# EAGLE board AZR3350 (EAGLE 9.2.2)
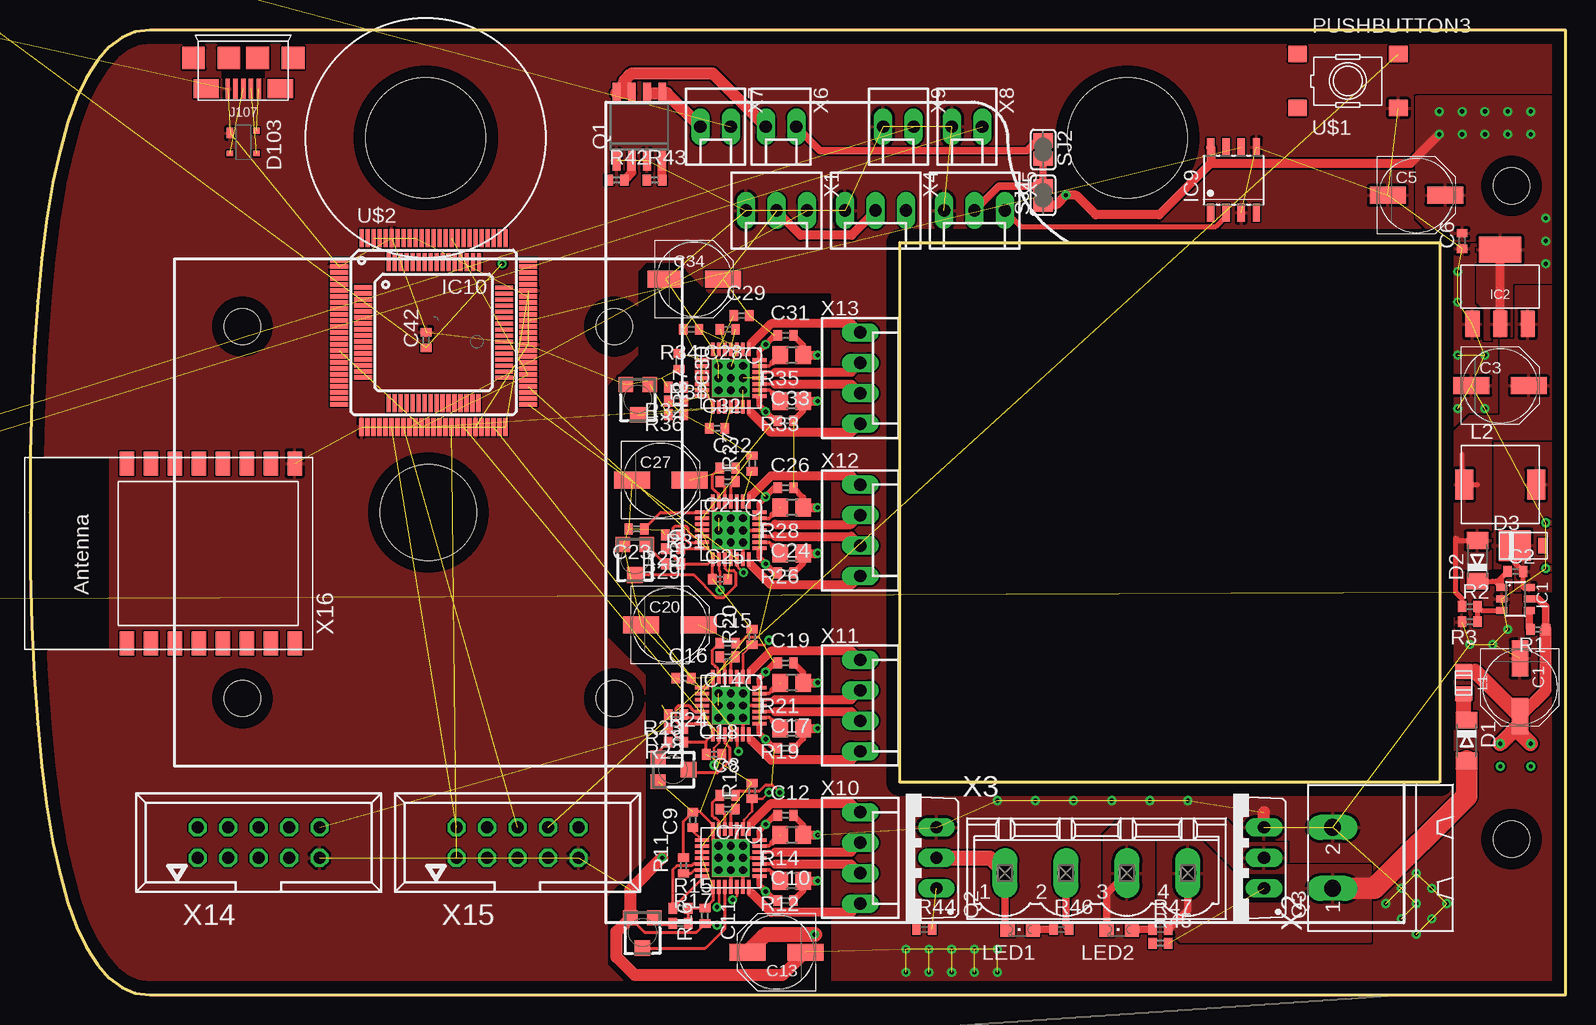
[diagram p0: board, top side]
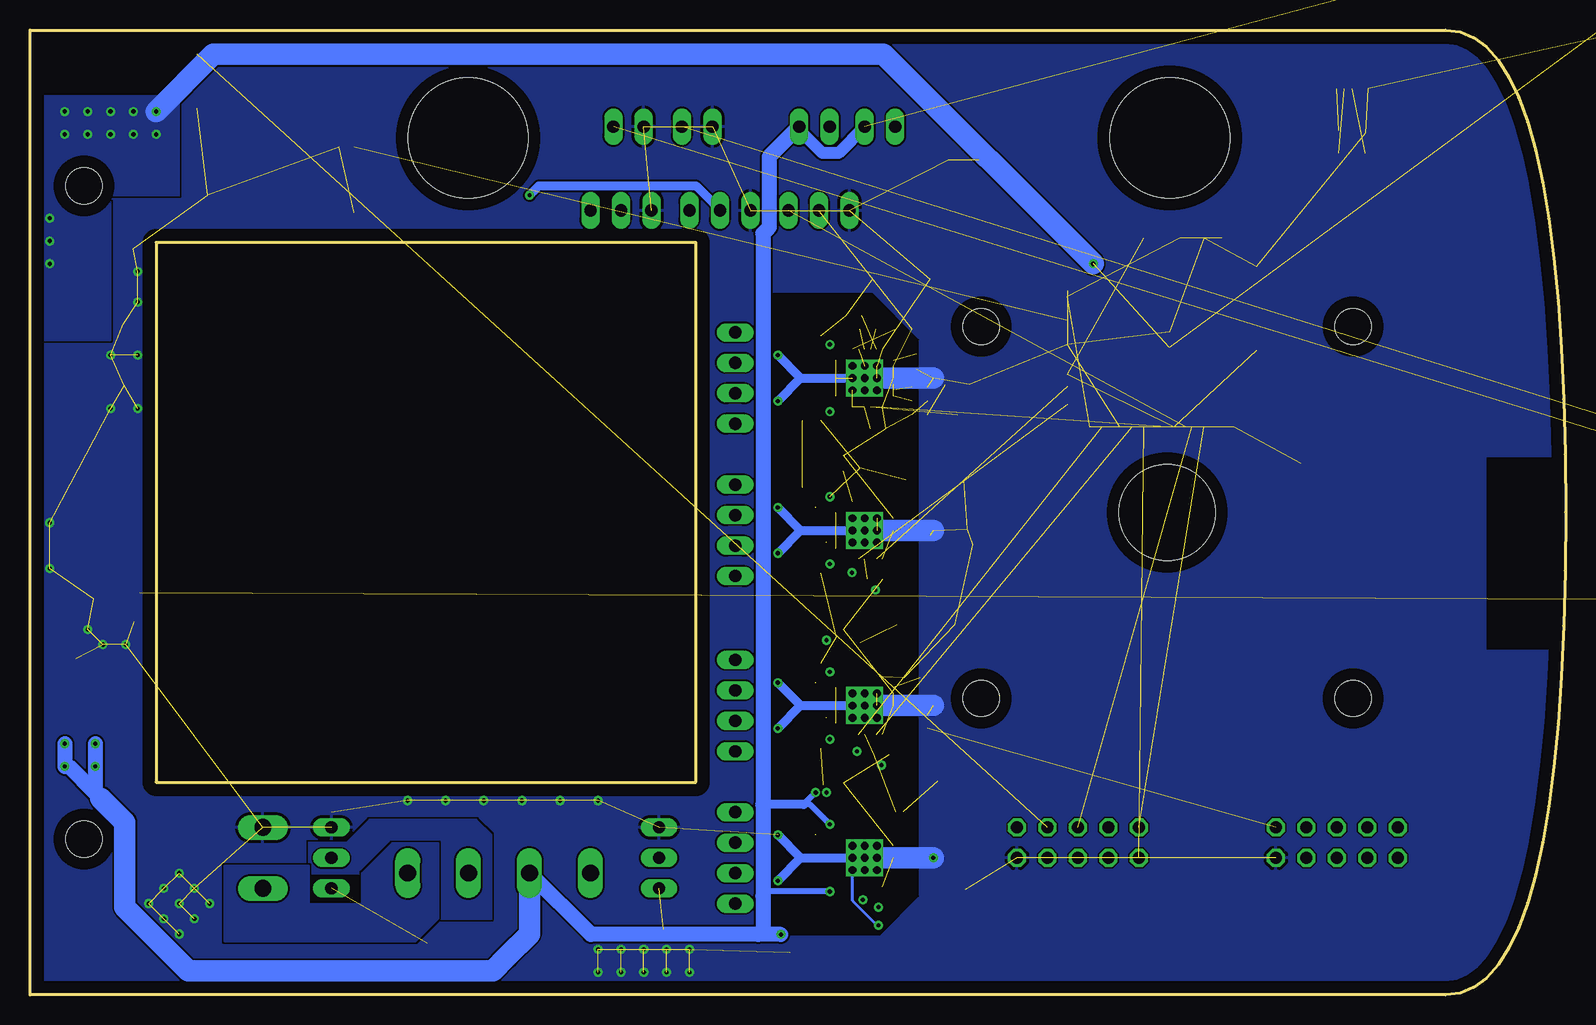
[diagram p1: board, bottom side, seen from below]

Size 128 x 80.46 mm. Coordinates in mm from the lower left corner, seen from the top.
Outline: 0,40.23 0.04,35.36 0.16,30.8 0.35,26.56 0.62,22.63 0.98,19.01 1.41,15.71 1.91,12.73 2.5,10.06 3.16,7.7 3.91,5.66 4.73,3.93 5.62,2.51 6.6,1.41 7.66,0.63 8.79,0.16 10,0 128,0 128,80.46 10,80.46 8.79,80.3 7.66,79.83 6.6,79.04 5.62,77.94 4.73,76.53 3.91,74.8 3.16,72.76 2.5,70.4 1.91,67.73 1.41,64.74 0.98,61.44 0.62,57.83 0.35,53.9 0.16,49.66 0.04,45.1 0,40.23
Outline: 117.5,62.73 117.5,17.73 72.5,17.73 72.5,62.73 117.5,62.73
Copper layers (1*16): Top 0.035mm / dielectric 1.5mm / Bottom 0.035mm
Design rules "default *": minimum track width 6mil, minimum drill 0.35mm, track to track 6mil, track to pad 6mil, pad to pad 6mil, via to via 6mil, smd to smd 6mil, copper to edge 40mil, drill to drill 6mil, minimum pad ring 10mil, minimum via ring 8mil, stop-mask expansion 4mil, vias tented up to drill 0mil, thermal gap 10mil
Net classes: 1 USB: width 0.102 mm, drill 0.1 mm; 2 gnd: width 0.102 mm, drill 0.1 mm; 3 usbvcc: width 0.102 mm, drill 0.1 mm, clearance 0.15 mm; 4 diff: width 0.152 mm
Holes 10 mm at 32.98,71.46 91.48,71.46
Holes 3 mm at 123.5,13 123.5,67.46 17.71,24.73 48.71,55.73 17.71,55.73 48.71,24.73
Holes 8 mm at 33.21,40.23
tKeepout: area 45.7,52.7 to 51.7,58.7; area 45.7,21.7 to 51.7,27.7; area 120.5,10 to 126.5,16; area 120.5,64.5 to 126.5,70.5; area 14.7,52.7 to 20.7,58.7; area 14.7,21.7 to 20.7,27.7

## Footprints (pad centres in the part's own frame; a part is rotated, then mirrored left to right if it is on the bottom)
R0402 = smd 0.7 x 0.9: 1 -0.65,0; 2 0.65,0
PANASONIC_D = smd 3 x 1.4: + 2.4,0; - -2.4,0
C0402 = smd 0.7 x 0.9: 1 -0.65,0; 2 0.65,0
C0603 = smd 1.1 x 1: 1 -0.85,0; 2 0.85,0
MINIMELF = smd 1.4 x 1.8: A 1.7,0; C -1.7,0
DO220AAL = smd 2.667 x 2.54: P$1 -0.7,0 | smd 0.762 x 1.27: P$2 1.65,0
SOT143B = smd 0.88 x 0.55: 1 -0.75,-1.1 | smd 0.48 x 0.55: 2 0.95,-1.1; 3 0.95,1.1; 4 -0.95,1.1
SOT23-6 = smd 0.6 x 0.9: 1 -0.95,-1.15; 2 0,-1.15; 3 0.95,-1.15; 4 0.95,1.15; 5 0,1.15; 6 -0.95,1.15
SOT223 = smd 2.235 x 1.219: 1 -3.099,2.311; 2 -3.099,0; 3 -3.099,-2.311 | smd 2.2 x 3.6: 4 3.099,0
QFN28-TP = smd 1.15 x 0.3: 1 -2.4,1.5; 2 -2.4,1; 3 -2.4,0.5; 4 -2.4,0; 5 -2.4,-0.5; 6 -2.4,-1; 7 -2.4,-1.5; 15 2.4,-1.5; 16 2.4,-1; 17 2.4,-0.5; 18 2.4,0; 19 2.4,0.5; 20 2.4,1; 21 2.4,1.5 | smd 0.3 x 1.15: 8 -1.5,-2.4; 9 -1,-2.4; 10 -0.5,-2.4; 11 0,-2.4; 12 0.5,-2.4; 13 1,-2.4; 14 1.5,-2.4; 22 1.5,2.4; 23 1,2.4; 24 0.5,2.4; 25 0,2.4; 26 -0.5,2.4; 27 -1,2.4; 28 -1.5,2.4 | smd 3.15 x 3.15: PAD 0,0
SOIC08-FAIRCHILD = smd 0.61 x 1.52: 1 -1.905,-2.723; 2 -0.635,-2.723; 3 0.635,-2.723; 4 1.905,-2.723; 5 1.905,2.723; 6 0.635,2.723; 7 -0.635,2.723; 8 -1.905,2.723
LQFP64 = smd 1.5 x 0.35: 1 -5.875,3.75; 2 -5.875,3.25; 3 -5.875,2.75; 4 -5.875,2.25; 5 -5.875,1.75; 6 -5.875,1.25; 7 -5.875,0.75; 8 -5.875,0.25; 9 -5.875,-0.25; 10 -5.875,-0.75; 11 -5.875,-1.25; 12 -5.875,-1.75; 13 -5.875,-2.25; 14 -5.875,-2.75; 15 -5.875,-3.25; 16 -5.875,-3.75; 33 5.875,-3.775; 34 5.875,-3.275; 35 5.875,-2.775; 36 5.875,-2.275; 37 5.875,-1.775; 38 5.875,-1.275; 39 5.875,-0.775; 40 5.875,-0.275; 41 5.875,0.225; 42 5.875,0.725; 43 5.875,1.225; 44 5.875,1.725; 45 5.875,2.225; 46 5.875,2.725; 47 5.875,3.225; 48 5.875,3.725 | smd 0.35 x 1.5: 17 -3.75,-5.875; 18 -3.25,-5.875; 19 -2.75,-5.875; 20 -2.25,-5.875; 21 -1.75,-5.875; 22 -1.25,-5.875; 23 -0.75,-5.875; 24 -0.25,-5.875; 25 0.25,-5.875; 26 0.725,-5.875; 27 1.225,-5.875; 28 1.725,-5.875; 29 2.225,-5.875; 30 2.725,-5.875; 31 3.225,-5.875; 32 3.725,-5.875; 49 3.775,5.875; 50 3.275,5.875; 51 2.75,5.875; 52 2.25,5.875; 53 1.75,5.875; 54 1.25,5.875; 55 0.75,5.875; 56 0.25,5.875; 57 -0.25,5.875; 58 -0.75,5.875; 59 -1.25,5.875; 60 -1.75,5.875; 61 -2.25,5.875; 62 -2.75,5.875; 63 -3.25,5.875; 64 -3.75,5.875
USB-MICRO-10103594 = smd 0.4 x 1.6: D+ 0,0; D- -0.65,0; GND 1.3,0; ID 0.65,0; VBUS -1.3,0 | smd 1.9 x 1.9: SHLD1 -1.2,-2.55; SHLD2 1.2,-2.55; SHLD3 -4.15,-2.55; SHLD4 4.15,-2.55 | smd 2.1 x 1.6: SHLD5 3.1,0; SHLD6 -3.1,0
C0805 = smd 1.5 x 1.25: 1 0,0.95; 2 0,-0.95
SRR0604 = smd 1.5 x 2.5: P$1 3,0; P$2 -3,0
C0603' = smd 1 x 0.95: 1 0,0.8; 2 0,-0.8
CHIPLED_0805 = smd 1.2 x 1.2: A 0,-1.05; C 0,1.05
M08A = smd 0.65 x 1.75: 1 -1.905,-2.8; 2 -0.635,-2.8; 3 0.635,-2.8; 4 1.905,-2.8; 5 1.905,2.8; 6 0.635,2.8; 7 -0.635,2.8; 8 -1.905,2.8
TO220BV = drill 1.016 long: D 0,-2.54; G -2.54,-2.54; S 2.54,-2.54
R0805 = smd 1.3 x 1.5: 1 -0.95,0; 2 0.95,0
RTRIM3103 = smd 1.2 x 1.25: 1 -1,-1.225; 3 1,-1.225 | smd 1.3 x 1.3: 2 0,1.3
SJ = smd 1.168 x 1.6: 1 -0.762,0; 2 0.762,0
TS42_4PINS = smd 1.6 x 1.4: 1 -4.2,2.25; 2 4.2,2.25; 3 -4.2,-2.25; 4 4.2,-2.25
LQFP100 = smd 1.5 x 0.35: 1 -7.875,6; 2 -7.875,5.5; 3 -7.875,5; 4 -7.875,4.5; 5 -7.875,4; 6 -7.875,3.5; 7 -7.875,3; 8 -7.875,2.5; 9 -7.875,2; 10 -7.875,1.5; 11 -7.875,1; 12 -7.875,0.5; 13 -7.875,0; 14 -7.875,-0.5; 15 -7.875,-1; 16 -7.875,-1.5; 17 -7.875,-2; 18 -7.875,-2.5; 19 -7.875,-3; 20 -7.875,-3.5; 21 -7.875,-4; 22 -7.875,-4.5; 23 -7.875,-5; 24 -7.875,-5.5; 25 -7.875,-6; 51 7.875,-6; 52 7.875,-5.5; 53 7.875,-5; 54 7.875,-4.5; 55 7.875,-4; 56 7.875,-3.5; 57 7.875,-3; 58 7.875,-2.5; 59 7.875,-2; 60 7.875,-1.5; 61 7.875,-1; 62 7.875,-0.5; 63 7.875,0; 64 7.875,0.5; 65 7.875,1; 66 7.875,1.5; 67 7.875,2; 68 7.875,2.5; 69 7.875,3; 70 7.875,3.5; 71 7.875,4; 72 7.875,4.5; 73 7.875,5; 74 7.875,5.5; 75 7.875,6 | smd 0.35 x 1.5: 26 -6.025,-7.875; 27 -5.525,-7.875; 28 -5.025,-7.875; 29 -4.525,-7.875; 30 -4.025,-7.875; 31 -3.525,-7.875; 32 -3.025,-7.875; 33 -2.525,-7.875; 34 -2.025,-7.875; 35 -1.525,-7.875; 36 -1.025,-7.875; 37 -0.525,-7.875; 38 -0.025,-7.875; 39 0.475,-7.875; 40 0.975,-7.875; 41 1.475,-7.875; 42 1.975,-7.875; 43 2.475,-7.875; 44 2.975,-7.875; 45 3.475,-7.875; 46 3.975,-7.875; 47 4.475,-7.875; 48 4.975,-7.875; 49 5.475,-7.875; 50 5.975,-7.875; 76 6,7.875; 77 5.5,7.875; 78 5,7.875; 79 4.5,7.875; 80 4,7.875; 81 3.5,7.875; 82 3,7.875; 83 2.5,7.875; 84 2,7.875; 85 1.5,7.875; 86 1,7.875; 87 0.5,7.875; 88 0,7.875; 89 -0.5,7.875; 90 -1,7.875; 91 -1.5,7.875; 92 -2,7.875; 93 -2.5,7.875; 94 -3,7.875; 95 -3.5,7.875; 96 -4,7.875; 97 -4.5,7.875; 98 -5,7.875; 99 -5.5,7.875; 100 -6,7.875
MOLEX-KK-254-3 = drill 1.02 long: 1 -2.54,0; 2 0,0; 3 2.54,0
MSTBA2 = drill 1.397 long: 1 -2.54,5.08; 2 2.54,5.08
MSTBV4 = drill 1.397 long: 1 -7.62,0; 2 -2.54,0; 3 2.54,0; 4 7.62,0
MOLEX-KK-254-2 = drill 1.02 long: 1 -1.27,0; 2 1.27,0
MOLEX-KK-254-4 = drill 1.02 long: 1 -3.81,0; 2 -1.27,0; 3 1.27,0; 4 3.81,0
057-010-1 = drill 1 octagon: 1 -5.08,-1.27; 2 -5.08,1.27; 3 -2.54,-1.27; 4 -2.54,1.27; 5 0,-1.27; 6 0,1.27; 7 2.54,-1.27; 8 2.54,1.27; 9 5.08,-1.27; 10 5.08,1.27
ESP-12 = smd 2 x 1.2: 1 -7.5,4.5; 2 -7.5,2.5; 3 -7.5,0.5; 4 -7.5,-1.5; 5 -7.5,-3.5; 6 -7.5,-5.5; 7 -7.5,-7.5; 8 -7.5,-9.5; 9 7.5,-9.5; 10 7.5,-7.5; 11 7.5,-5.5; 12 7.5,-3.5; 13 7.5,-1.5; 14 7.5,0.5; 15 7.5,2.5; 16 7.5,4.5
CRYSTAL_TC26SMD = smd 1.27 x 0.635: 1 0,1.27; 2 0,-1.27 | smd 1.905 x 2.032: P$1 5.715,0

## Placement (x,y rotation side)
4K7  [R0402]  -18.41,87 0 top  (outside the outline)
180R  [R0402]  -18.41,83.19 0 top  (outside the outline)
C1  10uF  [PANASONIC_D]  124.21,25.65 270 top
C2  10n  [C0402]  123.83,35.31 0 top
C3  47u  [PANASONIC_D]  122.56,50.8 0 top
C4  4.7uF  [C0402]  -58.42,32.77 0 top  (outside the outline)
C5  10uF  [PANASONIC_D]  115.57,66.67 0 top
C6  4.7uF  [C0402]  119.38,62.87 90 top
C7  100n  [C0402]  58.17,15.49 180 top
C8  100n  [C0402]  58.17,16.64 0 top
C9  220n  [C0402]  55.24,14.61 90 top
C10  100n  [C0402]  62.99,7.87 0 top
C11  220n  [C0402]  56.26,6.6 270 top
C12  100n  [C0402]  62.99,14.99 0 top
C13  100u  [PANASONIC_D]  62.23,3.56 180 top
C14  100n  [C0402]  58.17,28.19 180 top
C15  100n  [C0402]  58.17,29.34 0 top
C16  220n  [C0402]  54.48,26.42 0 top
C17  100n  [C0402]  62.99,20.57 0 top
C18  220n  [C0402]  57.02,20.07 0 top
C19  100n  [C0402]  62.99,27.69 0 top
C20  100u  [PANASONIC_D]  53.34,30.86 0 top
C21  100n  [C0402]  58.17,42.8 180 top
C22  100n  [C0402]  58.17,43.94 0 top
C23  220n  [C0402]  50.55,38.86 180 top
C24  100n  [C0402]  62.99,35.18 0 top
C25  220n  [C0402]  57.53,34.67 0 top
C26  100n  [C0402]  62.99,42.29 0 top
C27  100u  [PANASONIC_D]  52.58,42.93 0 top
C28  100n  [C0402]  58.17,55.5 180 top
C29  100n  [C0402]  59.31,56.64 0 top
C30  220n  [C0402]  54.1,52.83 270 top
C31  100n  [C0402]  62.99,54.99 0 top
C32  220n  [C0402]  57.28,47.24 0 top
C33  100n  [C0402]  62.99,47.88 0 top
C34  100u  [PANASONIC_D]  55.37,59.69 0 top
C35  100n  [C0402]  -78.74,27.3 270 top  (outside the outline)
C36  100n  [C0402]  -75.56,24.89 270 top  (outside the outline)
C37  100n  [C0402]  -74.42,24.89 270 top  (outside the outline)
C38  6.8p  [C0402]  -67.31,27.94 0 top  (outside the outline)
C39  6.8p  [C0402]  -67.31,26.67 0 top  (outside the outline)
C40  10u  [C0603]  -66.17,31.75 90 top  (outside the outline)
C41  100n  [C0402]  -64.64,31.75 90 top  (outside the outline)
C42  100n  [C0402]  33.02,54.61 90 top
C43  2.2u  [C0402]  -65.02,25.4 90 top  (outside the outline)
C44  2.2u  [C0402]  -63.88,26.04 270 top  (outside the outline)
D1  BYS10-45-E3  [MINIMELF]  119.76,21.21 270 top
D2  CD1206-S01575  [MINIMELF]  120.65,36.2 90 top
D3  SS1P3L  [DO220AAL]  124.46,37.47 0 top
D103  PRTR5V0U2XB  [SOT143B]  17.78,71.12 270 top
IC1  LM2734Y  [SOT23-6]  123.83,33.02 270 top
IC2  LDO-TS1117CW-3V3  [SOT223]  122.56,59.05 90 top
IC5  A4988  [QFN28-TP]  58.42,11.43 270 top
IC6  A4988  [QFN28-TP]  58.42,24.13 270 top
IC7  A4988  [QFN28-TP]  58.42,38.73 270 top
IC8  A4988  [QFN28-TP]  58.42,51.44 270 top
IC9  SI87XXIS  [SOIC08-FAIRCHILD]  100.33,67.94 0 top
IC10  ATSAM4S8B  [LQFP64]  33.66,55.24 0 top
J107  ZX62-AB-5PA  [USB-MICRO-10103594]  17.78,75.56 180 top
L1  MH2029-300Y  [C0805]  119.51,26.04 180 top
L2  10uH-SRR0604-100ML  [SRR0604]  122.56,42.55 0 top
L3  BLM18PG471SN1  [C0603']  -63.5,31.75 180 top  (outside the outline)
LED1  [CHIPLED_0805]  82.55,5.46 90 top
LED2  [CHIPLED_0805]  90.81,5.46 90 top
LED3  [CHIPLED_0805]  -10.79,92.08 0 top  (outside the outline)
LED4  [CHIPLED_0805]  -17.14,92.08 0 top  (outside the outline)
Q1  FDS6890A  [M08A]  50.8,72.39 0 top
Q2  IRF520  [TO220BV]  73.03,11.43 90 top
Q3  IRF520  [TO220BV]  100.33,11.43 90 top
R1  10k  [R0402]  125.73,30.48 180 top
R2  52.3k  [R0402]  120.02,32.38 0 top
R3  10k  [R0402]  120.02,31.11 180 top
R4  10K  [R0402]  -62.74,26.04 90 top  (outside the outline)
R5  10K  [R0402]  -61.59,25.4 270 top  (outside the outline)
R6  4K7 0.1%  [R0402]  -62.87,28.57 180 top  (outside the outline)
R11  10K  [R0402]  54.48,10.79 90 top
R12  0R2  [R0805]  63.5,9.53 180 top
R13  10K  [R0402]  60.2,17.02 90 top
R14  0R2  [R0805]  63.5,13.34 180 top
R15  100K  [R0402]  54.23,7.24 0 top
R16  10K  [RTRIM3103]  51.05,5.21 180 top
R17  20K  [R0402]  54.23,5.97 0 top
R18  10K  [R0402]  53.85,23.37 180 top
R19  0R2  [R0805]  63.5,22.23 180 top
R20  10K  [R0402]  60.2,29.84 90 top
R21  0R2  [R0805]  63.5,26.04 180 top
R22  100K  [R0402]  53.85,22.23 180 top
R23  10K  [RTRIM3103]  53.59,18.8 270 top
R24  20K  [R0402]  53.85,21.08 0 top
R25  10K  [R0402]  53.59,38.35 180 top
R26  0R2  [R0805]  63.5,36.83 180 top
R27  10K  [R0402]  60.2,44.32 90 top
R28  0R2  [R0805]  63.5,40.64 180 top
R29  100K  [R0402]  53.59,37.21 180 top
R30  10K  [RTRIM3103]  50.42,36.32 180 top
R31  20K  [R0402]  53.59,35.94 0 top
R32  10K  [R0402]  53.85,50.67 180 top
R33  0R2  [R0805]  63.5,49.53 180 top
R34  10K  [R0402]  55.12,55.5 180 top
R35  0R2  [R0805]  63.5,53.34 180 top
R36  100K  [R0402]  53.85,49.53 180 top
R37  10K  [RTRIM3103]  50.67,49.66 180 top
R38  20K  [R0402]  53.85,48.39 0 top
R39  4K7 0.1%  [R0402]  -62.87,29.72 180 top  (outside the outline)
R42  1K  [R0402]  48.9,67.94 0 top
R43  1K  [R0402]  52.07,67.94 0 top
R44  180R  [R0402]  74.55,5.46 0 top
R45  180R  [R0402]  94.23,4.32 0 top
R46  4K7  [R0402]  85.98,5.46 0 top
R47  4K7  [R0402]  94.23,5.46 0 top
SJ1  [SJ]  84.45,66.67 90 top
SJ2  [SJ]  84.45,70.48 270 top
U$1  PUSHBUTTON3  [TS42_4PINS]  109.86,76.2 0 top
U$2  ATSAM4S8C  [LQFP100]  33.66,55.24 0 top
X1  KK-254-3  [MOLEX-KK-254-3]  62.23,65.41 180 top
X2  MSTBA2  [MSTBA2]  113.67,11.43 90 top
X3  MSTBV4  [MSTBV4]  88.9,10.16 0 top
X4  KK-254-3  [MOLEX-KK-254-3]  70.48,65.41 180 top
X5  KK-254-3  [MOLEX-KK-254-3]  78.74,65.41 180 top
X6  KK-254-2  [MOLEX-KK-254-2]  62.61,72.39 180 top
X7  KK-254-2  [MOLEX-KK-254-2]  57.15,72.39 180 top
X8  KK-254-2  [MOLEX-KK-254-2]  78.11,72.39 180 top
X9  KK-254-2  [MOLEX-KK-254-2]  72.39,72.39 180 top
X10  KK-254-4  [MOLEX-KK-254-4]  69.22,11.43 270 top
X11  KK-254-4  [MOLEX-KK-254-4]  69.22,24.13 270 top
X12  KK-254-4  [MOLEX-KK-254-4]  69.22,38.73 270 top
X13  KK-254-4  [MOLEX-KK-254-4]  69.22,51.44 270 top
X14  057-010-1  [057-010-1]  19.05,12.7 0 top
X15  057-010-1  [057-010-1]  40.64,12.7 0 top
X16  [ESP-12]  12.57,36.83 90 top
XC1  32.768kHz  [CRYSTAL_TC26SMD]  -66.67,24.13 180 top  (outside the outline)

## Library data of the parts
4K7 180R C1-C44 R1-R6 R11-R39 R42-R47 = resistor
D1 D2 = Diodi; CASE: 1206; MONTHLY_USAGE: _____; PART_NUMBER: CD1206-S01575; PRICE: _____; SUPPLIER: _____; TYPE: Diodi
D3 = Diodi; CASE: SMP; MONTHLY_USAGE: _____; PART_NUMBER: SS1P3L-M3/84A; PRICE: _____; SUPPLIER: _____; TYPE: Diodi
D103 J107 L1 L3 XC1 = Arduino
IC1 = Circuito Integrato; CASE: SOT23-5; MONTHLY_USAGE: _____; PART_NUMBER: LM2734YMK; PRICE: _____; SUPPLIER: _____; TYPE: Circuito_Integrato
IC2 = we-power
IC5-IC8 = RepRapjr
IC9 IC10 U$2 = misc
L2 = Induttanze; CASE: SMD_6,5x6,5; MONTHLY_USAGE: _____; PART_NUMBER: SRR0604-100ML; PRICE: _____; SUPPLIER: _____; TYPE: Induttanze
LED1-LED4 = led
Q1-Q3 = transistor-power
SJ1 SJ2 = jumper
U$1 = Zero_V1.0
X1 X4-X13 = con-other
X2 = con-phoenix-508; MF: FARNELL; MPN: 1757242; OC_FARNELL: 3705171; OC_NEWARK: 71C4161
X3 = con-phoenix-508; MPN: MSTBV 2,5/4-GF-5.08; OC_FARNELL: 1792794; OC_NEWARK: 69R9847
X14 X15 = con-panduit; OC_FARNELL: unknown; OC_NEWARK: unknown
X16 = adafruit

## Nets
+3V3: C5.+ C6.2 C11.1 C18.1 C25.1 C32.1 C35.1 C37.1 C42.1 IC2.2 IC2.4 IC5.9 IC5.10 IC5.11 IC5.15 IC6.9 IC6.10 IC6.11 IC6.15 IC7.9 IC7.10 IC7.11 IC7.15 IC8.9 IC8.10 IC8.11 IC8.15 IC9.8 L3.2 LED4.A R13.2 R15.2 R17.2 R20.2 R22.2 R24.2 R27.2 R29.2 R31.2 R34.2 R36.2 R38.2 SJ1.1 X1.2 X4.2 X14.10
+5V [usbvcc]: C3.+ C4.1 D2.A IC2.3 L2.P$2 R2.1
+24V: C1.+ C8.2 C10.1 C12.1 C13.+ C15.2 C17.1 C19.1 C20.+ C22.2 C24.1 C26.1 C27.+ C29.2 C31.1 C33.1 C34.+ IC1.5 IC5.22 IC5.28 IC6.22 IC6.28 IC7.22 IC7.28 IC8.22 IC8.28 L1.2 LED3.A R1.1 R46.2 SJ2.1 X3.2 X6.1 X7.1
ADVREF: C40.1 C41.1 L3.1 R6.2 R39.2
BED: R45.1
BEEP: U$2.30
BEEPER: X14.1
BOOST: C2.1 D2.C IC1.1
BTN_EN1: X15.5
BTN_EN2: X15.3
BTN_ENC: X14.2
CARDDETECT: X15.7
CP1E: C28.1 IC8.4
CP1X: C7.1 IC5.4
CP1Y: C14.1 IC6.4
CP1Z: C21.1 IC7.4
CP2E: C28.2 IC8.5
CP2X: C7.2 IC5.5
CP2Y: C14.2 IC6.5
CP2Z: C21.2 IC7.5
E_DIR: IC8.19
E_EN: IC8.2 R34.1
E_STEP: IC8.16 U$2.37
EMOT1A: IC8.24 X13.3
EMOT1B: IC8.21 X13.4
EMOT2A: IC8.26 X13.2
EMOT2B: IC8.1 X13.1
EN: IC1.4 R1.2
ENC_B: U$2.40
ENC_SW: U$2.49
FAN1: R42.1
FAN2: R43.1
FB: IC1.3 R2.2 R3.1
GND: 4K7.2 180R.2 C1.- C3.- C4.2 C5.- C6.1 C9.2 C10.2 C11.2 C12.2 C13.- C16.2 C17.2 C18.2 C19.2 C20.- C23.2 C24.2 C25.2 C26.2 C27.- C30.2 C31.2 C32.2 C33.2 C34.- C35.2 C36.2 C37.2 C38.1 C39.1 C40.2 C41.2 C42.2 C43.2 C44.2 D3.P$2 D103.1 IC1.2 IC2.1 IC5.3 IC5.7 IC5.18 IC5.20 IC5.25 IC5.PAD IC6.3 IC6.7 IC6.18 IC6.20 IC6.25 IC6.PAD IC7.3 IC7.7 IC7.18 IC7.20 IC7.25 IC7.PAD IC8.3 IC8.7 IC8.18 IC8.20 IC8.25 IC8.PAD IC9.3 IC9.5 J107.GND Q1.1 Q1.3 Q2.S Q3.S R3.2 R11.2 R12.1 R14.1 R16.3 R18.2 R19.1 R21.1 R23.3 R25.2 R26.1 R28.1 R30.3 R32.2 R33.1 R35.1 R37.3 U$1.4 U$2.2 U$2.26 U$2.45 U$2.61 U$2.70 U$2.95 X1.3 X2.2 X4.3 X5.3 X8.2 X9.2 X14.9 X15.9 X16.9 XC1.P$1
HEATER0: U$2.25
HEATER1: U$2.47
HOTEND: R44.1
KILL: X15.10
LCD_CS: U$2.62
LCD_D4: X14.5
LCD_D5: X14.6
LCD_D6: X14.7
LCD_D7: X14.8
LCD_E: X14.3
LCD_RS: X14.4
MISO: U$2.41 X15.1
MOSI: U$2.33 X15.6
N$1: D1.C L1.1
N$2: R4.2 R6.1 X8.1
N$3: R5.2 R39.1 X9.1
N$5: U$2.27 U$2.50 U$2.69 U$2.91 U$2.98
N$6: U$2.16 U$2.36 U$2.56 U$2.85
N$11: D103.4 J107.VBUS
N$12: SJ1.2 SJ2.2 X5.2
N$13: Q1.2 R42.2
N$18: Q1.4 R43.2
N$19: R23.1 R24.1
N$20: Q2.G R44.2
N$21: Q1.5 Q1.6 X7.2
N$22: Q1.7 Q1.8 X6.2
N$23: LED1.C Q2.D X3.1
N$24: LED2.C Q3.D X3.3
N$25: Q3.G R45.2
N$26: LED1.A R46.1
N$27: LED2.A R47.1
N$33: 4K7.1 LED3.C
N$34: 180R.1 LED4.C
N$51: R30.1 R31.1
NPCS0: U$2.42
NRST: U$2.60
REFE: IC8.17 R37.2
REFE-IN: R37.1 R38.1
REFX: IC5.17 R16.2
REFX-IN: R16.1 R17.1
REFY: IC6.17 R23.2
REFZ: IC7.17 R30.2
RESET: U$1.2 X15.8
ROSCE: IC8.13 R32.1
ROSCX: IC5.13 R11.1
ROSCY: IC6.13 R18.1
ROSCZ: IC7.13 R25.1
RSTE: IC8.12 IC8.14 R36.1
RSTX: IC5.12 IC5.14 R15.1
RSTY: IC6.12 IC6.14 R22.1
RSTZ: IC7.12 IC7.14 R29.1
SCK: U$2.31 X15.2
SD_CD: U$2.58
SNS1E: IC8.23 R33.2
SNS1X: IC5.23 R12.2
SNS1Y: IC6.23 R19.2
SNS1Z: IC7.23 R26.2
SNS2E: IC8.27 R35.2
SNS2X: IC5.27 R14.2
SNS2Y: IC6.27 R21.2
SNS2Z: IC7.27 R28.2
SS: X15.4
SW [USB]: C2.2 D3.P$1 IC1.6 L2.P$1
T_BED: C43.1 R4.1
T_EXT: C44.1 R5.1
THERMISTOR0: U$2.24
THERMISTOR1: U$2.3
TWCK0: U$2.55
URXD1: U$2.7
USB_N [diff]: D103.3 J107.D-
USB_P [diff]: D103.2 J107.D+
UTXD1: U$2.9
VCC: X16.8
VCPE: C29.1 IC8.6
VCPX: C8.1 IC5.6
VCPY: C15.1 IC6.6
VCPZ: C22.1 IC7.6
VDDCORE: C36.1
VIN: D1.A R47.2 X2.1 X3.4
VREGE: C30.1 IC8.8
VREGX: C9.1 IC5.8
VREGY: C16.1 IC6.8
VREGZ: C23.1 IC7.8
X_DIR: IC5.19
X_EN: IC5.2 R13.1
X_STEP: IC5.16
X_STOP: U$2.34 X1.1
XIN32: C39.2 XC1.2
XMOT1A: IC5.24 X10.3
XMOT1B: IC5.21 X10.4
XMOT2A: IC5.26 X10.2
XMOT2B: IC5.1 X10.1
XOUT32: C38.2 XC1.1
Y_DIR: IC6.19 U$2.48
Y_EN: IC6.2 R20.1
Y_STEP: IC6.16 U$2.43
Y_STOP: X4.1
YMOT1A: IC6.24 X11.3
YMOT1B: IC6.21 X11.4
YMOT2A: IC6.26 X11.2
YMOT2B: IC6.1 X11.1
Z_DIR: IC7.19 U$2.51
Z_EN: IC7.2 R27.1
Z_STEP: IC7.16 U$2.54
Z_STOP: IC9.6 U$2.65
Z_STOP_IN: IC9.2 X5.1
ZMOT1A: IC7.24 X12.3
ZMOT1B: IC7.21 X12.4
ZMOT2A: IC7.26 X12.2
ZMOT2B: IC7.1 X12.1

## Tracks (layer width: path | path; a pad name or v marks a point on that pad's centre or on a via)
+3V3  (via drill 0.35)  (25 unrouted)
  Top 0.254: IC5.15 56.92,7.91 C11.1 54.89,7.25 R15.2 R17.2 | IC5.11 IC5.10 IC5.9 | R22.2 53.61,21.81 53.66,21.81 53.83,21.65 53.83,21.6 54.34,21.08 R24.2 56.27,21.08 56.37,21.18 | C18.1 56.37,21.18 | 56.37,21.18 IC6.15 | R29.2 54.21,35.94 R31.2 56.53,35.94 IC7.15 56.88,36.3 C25.1 | IC7.11 IC7.10 IC7.9
  Top 0.762: IC2.2 IC2.4 | 98.42,69.35 94.13,65.06 88.83,65.06 87.22,66.67 v86.36,66.67 85.6,65.91 SJ1.1 | X4.2 70.48,65.34 68.48,63.34 64.23,63.34 62.23,65.34 X1.2 | 98.42,69.35 115.07,69.35 v117.47,71.75 | IC9.8 98.42,69.35
  Bottom 0.762: v86.36,66.67 85.57,67.47 72.49,67.47 70.48,65.47 X4.2
  Bottom 1.778: v117.47,73.66 112.71,78.42 56.83,78.42 v39.37,60.96
  other vias: 119.38,73.66 121.28,73.66 123.19,73.66 125.09,73.66 125.09,71.75 123.19,71.75 121.28,71.75 119.38,71.75 126.36,64.77 126.36,62.87 126.36,60.96
  pour Top (rank 3): 123.83,54.61 121.28,54.61 121.28,57.15 120.65,57.78 120.65,62.87 117.47,62.87 115.57,64.77 115.57,74.93 127.64,74.93 127.64,58.42
  pour Bottom (rank 3): 121.28,54.61 121.28,66.67 115.57,66.67 115.57,74.93 127.64,74.93 127.64,54.61
+5V  (1 unrouted)
  Top 0.406: 120.65,42.55 L2.P$2 119.38,42.72 119.38,45.09 | R2.1 119.38,32.4 119.38,33.02 118.85,33.55 118.85,38.1 119.05,37.9 D2.A
  pour Top: 121.79,35.56 121.79,46.35 127.64,46.35 127.64,59.05 123.83,59.05 123.83,54.61 122.56,54.61 122.56,48.26 120.02,48.26 116.84,45.09 116.84,35.56
+24V  (via drill 0.35)  (13 unrouted)
  Top 0.254: 126.35,30.48 R1.1 | C8.2 59.22,17.04 60.82,17.04 61.32,17.54 61.87,17.54 62.25,17.15 62.25,17.13 v62.5,16.88 | 60.76,29.87 59.67,29.87 59.15,29.34 C15.2
  Top 0.305: 60.82,9.53 IC5.22 | 60.82,13.34 IC5.28 | 60.82,36.83 IC7.22 | 60.82,40.64 IC7.28 | 60.82,49.53 IC8.22 | 60.82,53.34 IC8.28 | 60.82,22.23 IC6.22 | 60.82,26.04 IC6.28
  Top 0.508: 60.82,9.74 60.82,9.53 60.82,9.13 v61.33,8.62 62.08,7.87 C10.1 | 60.82,13.12 60.82,13.34 60.82,13.73 v61.33,14.24 62.08,14.99 C12.1 | 60.82,37.05 60.82,36.83 60.82,36.44 v61.33,35.93 62.08,35.18 C24.1 | 60.82,40.42 60.82,40.64 60.82,41.03 v61.33,41.54 62.08,42.29 C26.1 | 60.82,49.75 60.82,49.53 60.82,49.14 v61.33,48.63 62.08,47.88 C33.1 | 60.82,53.12 60.82,53.34 60.82,53.73 v61.33,54.24 62.08,54.99 C31.1 | 60.82,22.44 60.82,22.23 60.82,21.83 v61.33,21.32 62.08,20.57 C17.1 | 60.82,25.82 60.82,26.04 60.82,26.43 v61.33,26.94 62.08,27.69 C19.1
  Top 0.61: IC1.5 125.73,33.02 126.36,32.38 126.35,32.37 126.35,30.48 | X6.1 65.87,70.4 83.1,70.4 83.95,71.25 SJ2.1 | X3.2 86.36,5.73 R46.2
  Top 1.016: C1.+ 126.35,25.4 126.35,30.48
  Top 1.27: L1.2 120.47,26.98 C1.+ | C1.+ 124.21,22.61 v122.56,20.95 | C1.+ 124.21,21.84 v125.09,20.95 | C13.+ 61.32,5.04 v65.41,5.04
  Bottom 0.508: v61.33,14.24 62.97,15.88 63.51,15.88 v62.5,16.88 | 66.9,8.26 66.53,8.62 v61.33,8.62
  Bottom 0.762: 63.51,15.88 66.9,15.88
  Bottom 1.016: X7.1 60.61,70.2 61.93,70.2 63.88,72.15 X6.1
  Bottom 1.27: v122.56,20.95 v122.56,19.05 122.56,16.87 | v125.09,20.95 v125.09,19.05 124.73,19.05 122.56,16.87 | 89.66,1.78 88.27,3.17 | 122.56,16.87 122.09,16.41 | 67.31,5.04 81.24,5.04 X3.2 | v65.41,5.04 67.31,5.04 | 67.31,5.04 66.9,5.46 66.9,8.26 66.9,15.88 66.9,63.49 66.39,64 66.39,69.88 X6.1
  Bottom 1.778: 122.09,16.41 120.09,14.41 120.09,7.32 114.81,2.03 89.41,2.03 88.27,3.17 86.36,5.08 X3.2
ADVREF  (4 unrouted)
BOOST
  Top 0.406: D2.C 121.92,34.49 122.15,34.49 | 122.15,34.49 IC1.1 122.67,34.81 | 122.67,34.81 C2.1 | 122.15,34.49 122.36,34.49 122.67,34.81
CP1E  (1 unrouted)
CP1X
  Top 0.254: IC5.4 58.42,15.1 C7.1
CP1Y
  Top 0.254: IC6.4 58.42,27.8 C14.1
CP1Z
  Top 0.254: IC7.4 58.42,42.4 C21.1
CP2E  (1 unrouted)
CP2X
  Top 0.254: IC5.5 57.92,15.09 C7.2
CP2Y
  Top 0.254: IC6.5 57.92,27.79 C14.2
CP2Z
  Top 0.254: IC7.5 57.92,42.4 C21.2
E_EN  (1 unrouted)
E_STEP  (1 unrouted)
EMOT1A
  Top 0.305: IC8.24 62.12,50.94
  Top 0.762: X13.3 68.44,50.94 62.12,50.94
EMOT1B
  Top 0.305: 60.14,48.52 59.92,48.75 IC8.21
  Top 0.762: X13.4 68.49,46.9 61.77,46.9 60.14,48.52
EMOT2A
  Top 0.305: IC8.26 62.12,51.94
  Top 0.762: X13.2 68.44,51.94 62.12,51.94
EMOT2B
  Top 0.305: IC8.1 59.92,54.12 60.14,54.35
  Top 0.762: X13.1 68.49,55.97 61.77,55.97 60.14,54.35
EN
  Top 0.61: R1.2 124.97,30.59 IC1.4
FB
  Top 0.406: R3.1 R2.2 120.98,32.07 IC1.3
GND  (via drill 0.35, 0.65)  (108 unrouted)
  Top 0.152: D3.P$2 126.36,37.47
  Top 0.254: R11.2 54.48,14.49 C9.2 55.87,15.26 56.92,14.2 IC5.7 | R16.3 51.25,5.24 55.55,5.24 C11.2 57.11,5.95 v57.26,5.8
  Top 0.305: IC5.18 v58.42,10.41 | IC5.20 59.42,10.4 v59.44,10.41 | IC5.25 v59.44,11.43 | IC5.3 58.92,12.95 v58.42,12.45 | IC5.7 56.92,12.93 v57.4,12.45 | IC6.18 v58.42,23.11 | IC6.20 59.42,23.1 v59.44,23.11 | IC6.25 v59.44,24.13 | IC6.3 58.92,25.66 v59.44,25.15 | IC6.7 56.92,25.63 v57.4,25.15 | IC7.18 v58.42,37.72 | IC7.20 59.42,37.7 v59.44,37.72 | IC7.25 v59.44,38.73 | IC7.7 56.92,40.48 57.4,39.99 v57.4,39.75 | IC7.3 58.92,40.25 v58.42,39.75
  Top 0.508: C12.2 64.45,14.18 R14.1 | C10.2 64.45,8.68 R12.1 | C19.2 64.45,26.88 R21.1 | C17.2 64.45,21.38 R19.1 | C26.2 64.45,41.48 R28.1 | C24.2 64.45,35.99 R26.1 | C31.2 64.45,54.18 R35.1 | C33.2 64.45,48.69 R33.1
  Top 0.762: R14.1 v65.66,13.34 | R12.1 v65.66,9.53 | R21.1 v65.66,26.04 | R19.1 v65.66,22.23 | R28.1 v65.66,40.64 | R26.1 v65.66,36.83 | R35.1 v65.66,53.34 | R33.1 v65.66,49.53
  Top 1.016: C13.- 62.73,1.65 50.42,1.65 48.9,3.17 48.9,5.27 R16.3 50.05,8.78 v52.7,11.43 | Q3.S 102.87,15.24
  Bottom 0.254: v57.26,5.8 57.38,5.8 59.44,7.85 v59.44,10.41
  Bottom 0.762: v59.44,12.45 v59.44,11.43 v59.44,10.41 | v59.44,12.45 v58.42,12.45 v57.4,12.45 | v57.4,12.45 v57.4,11.43 v57.4,10.41 | v57.4,10.41 v58.42,10.41 v59.44,10.41 | IC5.PAD v57.4,12.45 | IC5.PAD v59.44,10.41 | v57.4,10.41 IC5.PAD | IC5.PAD v59.44,12.45 | v65.66,9.53 63.75,11.43 | 63.75,11.43 IC5.PAD | v65.66,13.34 63.75,11.43 | v59.44,25.15 v59.44,24.13 v59.44,23.11 | v59.44,25.15 v58.42,25.15 v57.4,25.15 IC6.PAD | v59.44,23.11 v58.42,23.11 v57.4,23.11 IC6.PAD | IC6.PAD v59.44,23.11 | IC6.PAD v59.44,25.15 | v65.66,22.23 63.75,24.13 | 63.75,24.13 IC6.PAD | v65.66,26.04 63.75,24.13 | v59.44,39.75 v59.44,38.73 v59.44,37.72 | v59.44,39.75 v58.42,39.75 v57.4,39.75 IC7.PAD | v59.44,37.72 v58.42,37.72 v57.4,37.72 IC7.PAD | IC7.PAD v59.44,37.72 | IC7.PAD v59.44,39.75 | v65.66,36.83 63.75,38.73 | 63.75,38.73 IC7.PAD | v65.66,40.64 63.75,38.73 | v59.44,52.45 v59.44,51.44 v59.44,50.42 | v59.44,52.45 v58.42,52.45 v57.4,52.45 IC8.PAD | v59.44,50.42 v58.42,50.42 v57.4,50.42 IC8.PAD | IC8.PAD v59.44,50.42 | IC8.PAD v59.44,52.45 | v65.66,49.53 63.75,51.44 | 63.75,51.44 IC8.PAD | v65.66,53.34 63.75,51.44
  Bottom 1.778: v57.4,11.43 v52.7,11.43 | v57.4,24.13 52.7,24.13 | v57.4,38.73 52.7,38.73 | v57.4,51.44 52.7,51.44
  other vias: 119.02,48.9 121.28,48.9 119.02,53.34 121.28,53.34 119.02,57.78 119.02,60.33 121.92,29.21 120.02,29.21 123.19,30.48 126.36,35.56 126.36,39.37 58.42,11.43 58.42,24.13 58.42,38.73 58.42,51.44 96.52,16.21 93.34,16.21 90.17,16.21 87,16.21 83.82,16.21 80.64,16.21 73.03,3.81 74.93,3.81 76.83,3.81 76.83,1.91 74.93,1.91 73.03,1.91 113.03,7.62 114.3,8.89 115.57,10.16 116.84,8.89 115.57,7.62 114.3,6.35 115.57,5.08 116.84,6.35 118.11,7.62 78.74,3.81 80.64,3.81 80.64,1.91 78.74,1.91
  pour Bottom (rank 4): -2.54,-2.54 129.54,-2.54 129.54,82.55 -2.54,82.55
  pour Top (rank 4): -1.27,-1.27 128.27,-1.27 128.27,81.28 -1.27,81.28
  cutout Bottom: 53.98,8.26 53.98,54.61 57.78,58.42 66.67,58.42 66.67,5.08 57.15,5.08
  cutout Top: 48.26,50.8 50.8,53.34 50.8,60.33 51.44,60.96 53.98,60.96 56.52,58.42 66.67,58.42 66.67,0 50.8,0 48.26,2.54 48.26,8.26 51.44,11.43 51.44,26.67 48.26,29.84
MISO  (1 unrouted)
MOSI  (1 unrouted)
N$1
  Top 1.27: D1.C 119.51,23.16 L1.1
N$2  (2 unrouted)
N$3  (2 unrouted)
N$4
  pour Bottom (rank 2): 93.98,6.35 89.53,6.35 89.53,13.34 90.81,14.61 99.69,14.61 101.6,12.7 104.78,12.7 104.78,10.16 100.33,10.16 97.79,12.7 93.98,12.7
N$5  (4 unrouted)
N$6  (3 unrouted)
N$11  (1 unrouted)
N$12
  Top 0.61: SJ2.2 SJ1.2 80.77,67.44 X5.2
N$13
  Top 0.762: R42.2 50.16,68.56 Q1.2
N$18
  Top 0.762: R43.2 52.7,67.96 Q1.4
N$19
  Top 0.254: R23.1 52.37,20.25 R24.1
N$20  (1 unrouted)
N$21
  Top 0.305: Q1.6 51.61,75.19
  Top 1.016: 51.61,75.19 Q1.5 53.08,75.19 X7.2
N$22
  Top 0.305: Q1.7 49.99,75.19
  Top 1.016: 49.99,75.19 49.53,75.19 | 49.53,75.19 Q1.8 | 49.53,75.19 49.53,76.2 50.16,76.83 56.9,76.83 X6.2
N$23
  Top 0.61: LED1.C 81.28,5.68 X3.1
  Top 1.27: Q2.D 80.01,11.43 X3.1
N$24
  Top 0.61: LED2.C 89.75,8.47 X3.3
  pour Top (rank 2): 93.98,6.35 89.53,6.35 89.53,13.34 90.81,14.61 99.69,14.61 101.6,12.7 104.78,12.7 104.78,10.16 100.33,10.16 97.79,12.7 93.98,12.7
N$25  (1 unrouted)
N$26
  Top 0.61: R46.1 LED1.A
N$27
  Top 0.61: R47.1 LED2.A
N$33  (1 unrouted)
N$34  (1 unrouted)
N$51
  Top 0.254: R31.1 51.42,37.47 R30.1
REFE  (1 unrouted)
REFE-IN  (1 unrouted)
REFX
  Top 0.254: R16.2 56.3,3.91 57.92,5.53 IC5.17
REFX-IN
  Top 0.406: R16.1 52.52,5.97 R17.1
REFY
  Top 0.254: IC6.17 57.92,21.01 58.3,20.63 58.3,19.5 57.31,18.51 55.18,18.51 R23.2
REFZ
  Top 0.254: R30.2 55.34,35.02 57.24,33.11 57.82,33.11 58.81,34.1 58.81,35.24 58.65,35.4 58.09,35.4 57.92,35.57 IC7.17
RESET  (1 unrouted)
ROSCE  (1 unrouted)
ROSCX
  Top 0.254: IC5.13 55.4,10.43 55.12,10.14 R11.1
ROSCY
  Top 0.254: R18.1 54.74,23.13 IC6.13
ROSCZ
  Top 0.254: R25.1 54.3,38.35 54.91,37.73 IC7.13
RSTE  (2 unrouted)
RSTX
  Top 0.254: IC5.14 56.02,9.68 R15.1 53.58,10.44 53.92,10.77 55.17,10.77 55.33,10.93 IC5.12
RSTY
  Top 0.254: IC6.14 54.9,22.63 R22.1 54.08,22.64 54.03,22.64 53.87,22.8 53.87,23.93 54.03,24.1 54.96,24.1 55.17,23.9 55.17,23.86 55.4,23.63 IC6.12
RSTZ
  Top 0.254: IC7.14 56,37.21 R29.1 54.19,37.21 53.62,37.79 53.62,38.92 53.78,39.08 54.71,39.08 54.87,38.92 54.87,38.63 55.27,38.23 IC7.12
SCK  (1 unrouted)
SNS1E
  Top 0.305: IC8.23 61.65,50.44 61.93,50.15
  Top 0.508: 61.93,50.15 R33.2
SNS1X
  Top 0.305: 61.93,10.14 61.65,10.43 IC5.23
  Top 0.508: R12.2 61.93,10.14
SNS1Y  (1 unrouted)
  Top 0.305: IC6.23 61.59,23.13 | 61.65,23.13 61.93,22.84
  Top 0.508: 61.93,22.84 R19.2
SNS1Z  (1 unrouted)
  Top 0.305: IC7.23 61.59,37.73 | 61.65,37.73 61.93,37.45
  Top 0.508: 61.93,37.45 R26.2
SNS2E
  Top 0.305: IC8.27 61.59,52.44 61.88,52.72
  Top 0.508: R35.2 62.5,53.34 61.88,52.72
SNS2X  (1 unrouted)
  Top 0.305: IC5.27 61.59,12.43 61.88,12.72
  Top 0.508: 61.88,12.72 62.5,13.34
SNS2Y  (1 unrouted)
  Top 0.305: IC6.27 61.59,25.13 61.88,25.42
  Top 0.508: 61.88,25.42 62.5,26.04
SNS2Z  (1 unrouted)
  Top 0.305: IC7.27 61.59,39.73 61.88,40.02
  Top 0.508: 61.88,40.02 62.5,40.64
SW
  Top 0.406: D3.P$1 123.76,36.02 123.88,35.9 C2.2 124.47,33.97 IC1.6
  pour Top (rank 2): 123.83,33.66 123.83,35.56 121.92,35.56 121.92,46.35 127.64,46.35 127.64,33.66
T_BED  (1 unrouted)
T_EXT  (1 unrouted)
USB_N  (1 unrouted)
USB_P  (1 unrouted)
VCPE  (1 unrouted)
VCPX
  Top 0.254: C8.1 57.46,16.64 56.89,16.06 56.89,14.93 57.05,14.77 57.15,14.77 57.42,14.49 IC5.6
VCPY
  Top 0.254: IC6.6 57.35,26.6 57.35,27.22 57.19,27.38 57.13,27.38 56.89,27.63 56.89,28.76 57.46,29.34 C15.1
VCPZ
  Top 0.254: C22.1 57.46,43.94 56.89,43.37 56.89,42.23 57.13,41.99 57.19,41.99 57.4,41.78 57.4,41.16 IC7.6
VIN
  Top 0.61: R47.2 96.52,7.1 X3.4
  Top 1.778: D1.A 119.76,16.58 112.08,8.89 X2.1
  pour Top: 111.76,10.79 104.78,10.79 104.78,7.62 100.33,7.62 100.33,10.16 97.79,12.7 93.98,12.7 93.98,6.35 95.89,4.45 111.76,4.45
VIN1
  pour Bottom: 111.76,10.79 104.78,10.79 104.78,7.62 100.33,7.62 100.33,10.16 97.79,12.7 93.98,12.7 93.98,6.35 95.89,4.45 111.76,4.45
VREGE  (1 unrouted)
VREGX
  Top 0.254: C9.1 55.24,13.71 IC5.8
VREGY  (1 unrouted)
VREGZ
  Top 0.254: C23.1 52.57,40.23 IC7.8
X_DIR  (via drill 0.35)
  Top 0.203: IC5.19 58.92,8.27 v58.58,7.92
X_EN  (via drill 0.35)
  Top 0.203: IC5.2 59.51,13.92 59.51,14.61 60.2,15.29 R13.1 61.08,16.37 v61.59,16.88
X_STEP  (via drill 0.35)
  Top 0.203: IC5.16 57.42,7.48 v57.26,7.33
X_STOP  (1 unrouted)
XIN32  (1 unrouted)
XMOT1A
  Top 0.305: IC5.24 62.12,10.93
  Top 0.762: X10.3 68.44,10.93 62.12,10.93
XMOT1B
  Top 0.305: 60.14,8.52 59.92,8.74 IC5.21
  Top 0.762: X10.4 68.49,6.89 61.77,6.89 60.14,8.52
XMOT2A
  Top 0.305: IC5.26 62.12,11.93
  Top 0.762: X10.2 68.44,11.93 62.12,11.93
XMOT2B
  Top 0.305: IC5.1 59.92,14.12 60.14,14.34
  Top 0.762: X10.1 68.49,15.97 61.77,15.97 60.14,14.34
XOUT32  (1 unrouted)
Y_DIR  (via drill 0.35)  (1 unrouted)
  Top 0.254: IC6.19 58.92,20.45 v59.05,20.32
Y_EN  (via drill 0.35)
  Top 0.203: v61.59,29.58 61.21,29.2 R20.1 59.42,28.42 IC6.2
Y_STEP  (via drill 0.35)  (1 unrouted)
  Top 0.203: v57.02,19.17 57.02,20.61 57.42,21.01 IC6.16
YMOT1A
  Top 0.305: IC6.24 62.12,23.63
  Top 0.762: X11.3 68.44,23.63 62.12,23.63
YMOT1B
  Top 0.305: 60.14,21.22 59.92,21.44 IC6.21
  Top 0.762: X11.4 68.49,19.59 61.77,19.59 60.14,21.22
YMOT2A
  Top 0.305: IC6.26 62.12,24.63
  Top 0.762: X11.2 68.44,24.63 62.12,24.63
YMOT2B
  Top 0.305: IC6.1 59.92,26.82 60.14,27.04
  Top 0.762: X11.1 68.49,28.67 61.77,28.67 60.14,27.04
Z_DIR  (via drill 0.35)  (1 unrouted)
  Top 0.203: v59.47,35.21 59.17,35.51 59.16,35.51 58.92,35.75 IC7.19
Z_EN  (1 unrouted)
Z_STEP  (via drill 0.35)  (1 unrouted)
  Top 0.203: IC7.16 57.42,35.42 57.53,35.31 v57.53,33.77
Z_STOP  (1 unrouted)
Z_STOP_IN
  Top 0.406: X5.1 82.61,64.07 98.84,64.07 99.69,64.92 IC9.2
ZMOT1A
  Top 0.305: IC7.24 62.12,38.23
  Top 0.762: X12.3 68.44,38.23 62.12,38.23
ZMOT1B
  Top 0.305: 60.14,35.82 59.92,36.05 IC7.21
  Top 0.762: X12.4 68.49,34.2 61.77,34.2 60.14,35.82
ZMOT2A
  Top 0.305: IC7.26 62.12,39.23
  Top 0.762: X12.2 68.44,39.23 62.12,39.23
ZMOT2B
  Top 0.305: IC7.1 59.92,41.42 60.14,41.65
  Top 0.762: X12.1 68.49,43.27 61.77,43.27 60.14,41.65